# Altium PCB new.PcbDoc (part 2 of 2)
Units mil, origin at the board's own origin, x right, y up, seen from the top; angles counter-clockwise.
Board outline 2755.91 x 2755.91 mil, 4 copper layers (Top Layer, Power Plane, Ground Plane, Bottom Layer), stack 61.12 mil thick; 162 components, 148 nets, 888 pads, 434 vias.
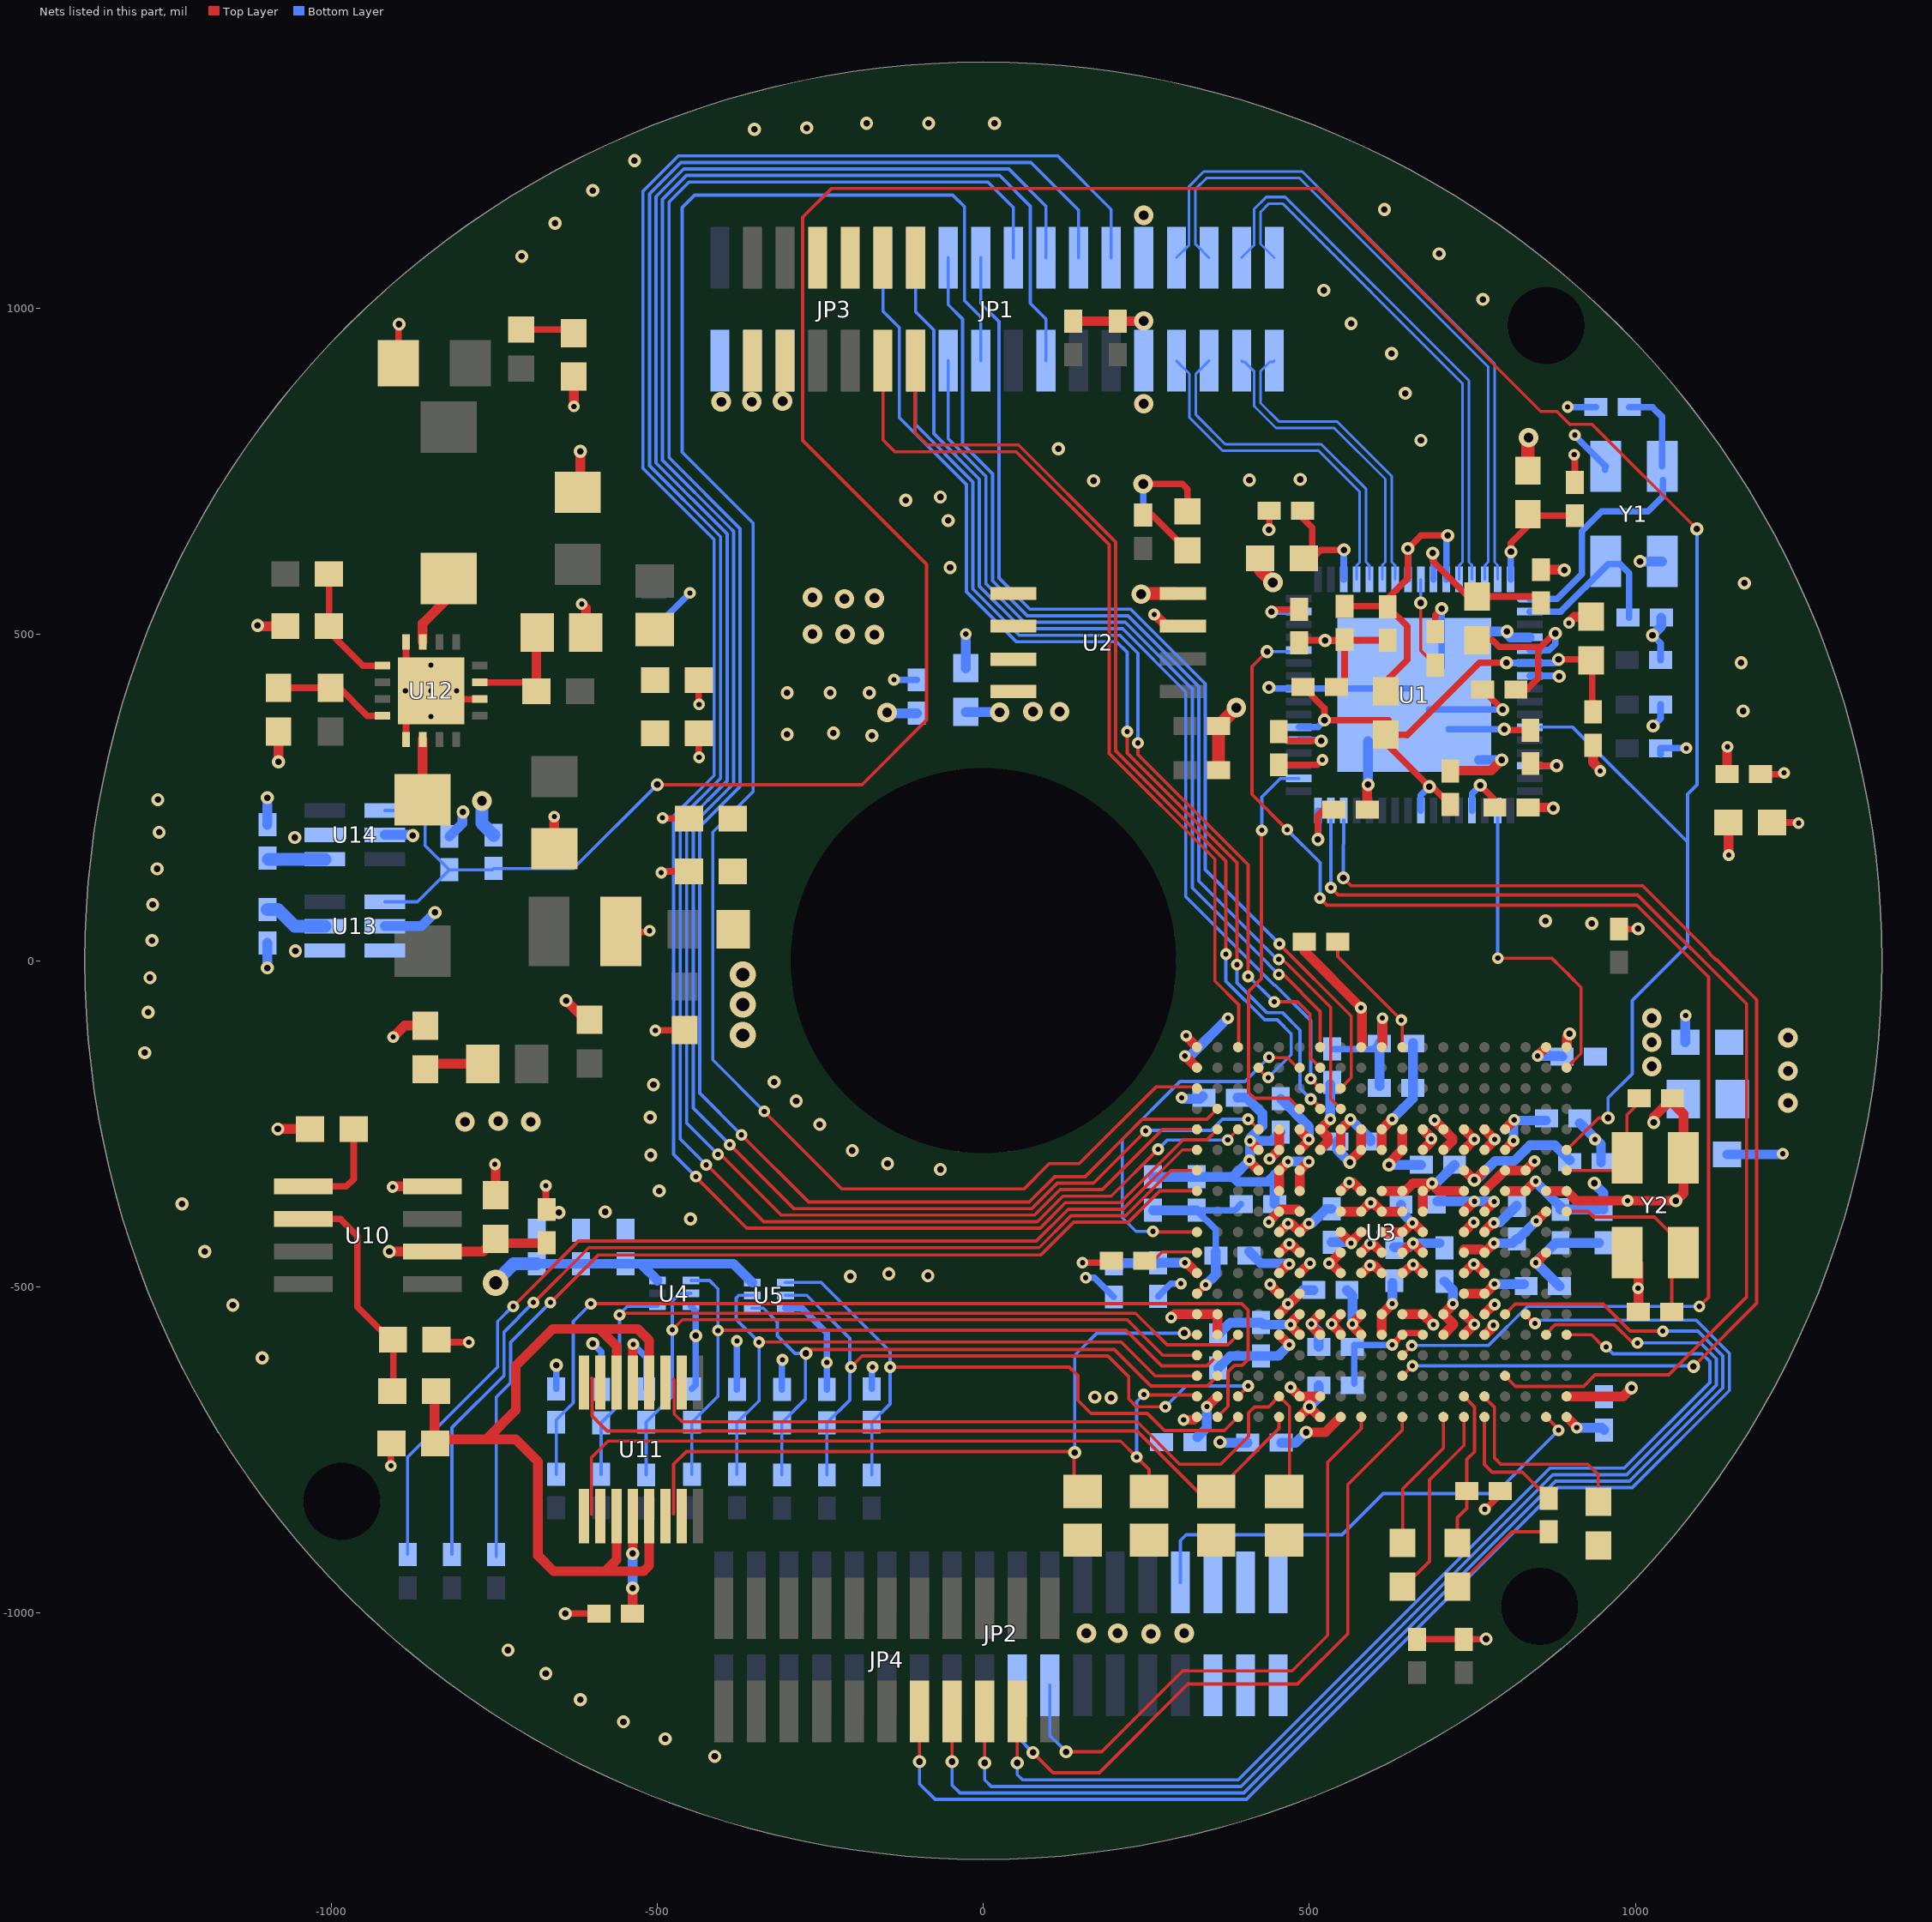
[diagram p4: the nets of this part, all layers, seen from the top]

## Via types
v1: diameter 18, hole 8, Top Layer to Bottom Layer, 208 vias
v2: diameter 20, hole 10, Top Layer to Bottom Layer, 181 vias
v3: diameter 30, hole 15, Top Layer to Bottom Layer, 41 vias
v4: diameter 40, hole 20, Top Layer to Bottom Layer, 4 vias

## Nets (pads, with @x,y where several pads share a name; then routed paths per layer and width w, separated by ;. In a path a pad name is that pad's centre, name@x,y a point inside that pad or via, vN(x,y) a via of type N, cw(c..) or ccw(c..) an arc to the next point about the centre after c; other vN are vias at no path point) (continued)
GND: C1.2 C2.2 C3.1 C4.1 C5.1 C6.1 C7.1 C8.1 C9.1 C10.1 C11.1 C12.1 C13.1 C14.1 C15.1 C16.1 C17.1 C19.1 C20.1 C21.1 C22.1 C23.1 C24.1 C25.1 C26.1 C27.1 C28.1 C29.1 C30.1 C31.1 C32.1 C33.1 C34.1 C35.1 C36.1 C37.2 C38.2 C39.2 C40.2 C41.2 C42.2 C43.2 C44.1 C45.1 C46.1 C47.1 C48.1 C49.1 C50.2 C51.2 C53.2 C54.2 C55.2 C56.2 C57.2 C58.2 C61.1 C62.1 C63.1 C64.1 C65.1 C66.1 C67.1 C85.1 C86.1 C87.1 C88.1 C89.1 C90.1 C91.1 C92.1 C93.1 C94.1 C95.1 C96.1 C97.1 C98.2 C99.1 C100.2 C101.2 C102.2 C104.2 C105.2 C106.2 C107.2 C108.2 C109.1 C110.1 C111.1 C112.1 C113.1 C114.1 JP1.9 JP1.10 JP2.31 JP2.32 JP2.33 JP2.34 JP2.35 JP2.36 JP3.1 JP3.3 JP3.5 JP3.7 R1.1 R2.2 R3.2 R6.2 R7.2 R8.2 R12.1 R49.2 R51.2 R53.1 R62.1 U1.4 U1.41 U1.65 U2.1 U2.2 U2.3 U2.4 U2.7 U3.A1 U3.A10 U3.A19 U3.E5 U3.E6 U3.E8 U3.E12 U3.E14 U3.E15 U3.F5 U3.F6 U3.F8 U3.F12 U3.F14 U3.F15 U3.G16 U3.G17 U3.H8 U3.H9 U3.H10 U3.H11 U3.H12 U3.H14 U3.H15 U3.J5 U3.J6 U3.J8 U3.J9 U3.J10 U3.J11 U3.J12 U3.K8 U3.K9 U3.K10 U3.K11 U3.K12 U3.K14 U3.K15 U3.L5 U3.L6 U3.L8 U3.L9 U3.L10 U3.L11 U3.L12 U3.L18 U3.M8 U3.M9 U3.M10 U3.M11 U3.M12 U3.M14 U3.M15 U3.N1 U3.N5 U3.N6 U3.P1 U3.P2 U3.P5 U3.P7 U3.P8 U3.P11 U3.P12 U3.P14 U3.P15 U3.R2 U3.R5 U3.R7 U3.R8 U3.R14 U3.R15 U3.V6 U3.V7 U3.W1 U3.W6 U3.W7 U3.W19 U4.3 U5.3 U10.4 U11.13 U12.4 U12.9 U12.14 U12.17 U13.2 U14.2 Y1.2 Y1.4 | length 8069.4
  Top Layer w10: v1(-908.54,-774.54) v1(-908.54,-774.54) C95.1@-908.46,-734 ; C101.2@-897.12,916 -897.12,974.88 v2(-896,976) ; U12.9@-885.39,339.2 U12.17@-885.39,375.61 ; U12.17@-885.39,452.39 U12.4@-885.39,488.8 ; C94.1@-838.54,-585 v1(-789,-585) ; U12.17@-834.2,401.2 U12.14@-772.2,401.2 ; C96.1@-671,-380.41 v1(-671,-345) ; v2(-641,-1001) C89.1@-589.59,-1001 ; C102.2@-562.88,44 -514,44 v1(-512,46) ; v1(-503,-107) -502.46,-106.46 C57.2@-458,-106.46 ; v1(-494,135) -492.01,136.99 C58.2@-451.46,136.99 ; v1(-492,219) -491,218 C108.2@-451.46,218 ; C51.2@-436.54,349 -436.54,312.54 v1(-436,312) ; C107.2@-436.54,430 -436.54,393.54 v1(-436,393) ; v1(152,-463) 198.41,-463 199.41,-462 203.41,-466 R62.1@210.41,-459 ; U3.N1@327.54,-510.48 v1(341,-497) ; v2(437.82,661) 438.41,661.59 C3.1@438.41,690 ; C12.1@450.58,300.42 C12.1@453.01,300.42 512.42,300.42 v1(520,308) ; C13.1@488.01,491.42 C7.1@554.01,491.42 ; C14.1@541.6,420.01 554.01,432.42 C7.1@554.01,491.42 ; C7.1@554.01,492.42 C7.1@554.01,491.42 ; C6.1@620.01,491.42 C7.1@554.01,491.42 ; R1.1@693,504.59 693,530 v2(703,540) ; C8.1@765.42,416.01 v2(796.43,385) ; v1(769,-841) 770,-841 792.59,-818.41 R12.1@792.59,-813 ; v2(799,355) 800.4,353.6 C9.1@839.01,353.6 ; v1(906,776) 907.01,774.99 C4.1@907.01,733.6 ; C112.1@1191.59,286 1226,286 v1(1228,288) ; C111.1@1209.46,212 1249,212 v1(1250,211)
  Top Layer w15: v2(-1113,514) -1112,513 R49.2@-1070.46,513 ; v2(-1082,-258) C88.1@-1032.46,-258 ; v2(-1081,305) R51.2@-1081,351.54 ; v1(-906,-347) -905,-346 U10.4@-842,-346 ; v1(-905,-117) -887.54,-99.54 C54.2@-856,-99.54 ; v1(-749,-312) -748,-313 C97.1@-748,-359.54 C97.1@-743.87,-355.41 ; C100.2@-657.99,171.89 v1(-657.99,220.99) ; v2(-640,-61) -604,-97 C53.2@-604,-97.54 ; v1(-628,850) R53.1@-628,895.54 ; C98.2@-617.99,715.13 v2(-618,781) ; v1(-616,547) -609.59,540.59 C99.1@-609.59,503.01 ; U11.13@-537.5,-646.5 -537.5,-593.5 -538,-593 -537,-592 v1(-537,-588) ; R3.2@138,980.59 R2.2@206,980.59 245.59,980.59 v3(246,981) ; v1(262,531) 263,531 281,513 U2.7@309.6,513 ; v1(288,-547) 293.02,-541.98 U3.P1@327.54,-541.98 U3.P2@359.04,-541.98 U3.R2@359.04,-573.47 ; v1(307,-704) 323,-704 U3.W1@327.54,-699.46 ; v1(311.01,-114.99) 310.01,-114.99 U3.A1@327.54,-132.53 ; v1@437.49,-305.48 438.06,-305.48 U3.F5@453.53,-290.01 U3.E5@453.53,-258.51 ; v1(437.81,-400.78) 437.81,-400.22 U3.J5@453.53,-384.5 456.53,-381.49 482.02,-381.49 U3.J6@485.02,-384.5 ; v1(439.8,-496.2) 439.8,-496.76 U3.N5@453.53,-510.48 U3.N5@453.53,-509.47 ; U3.R5@453.53,-573.47 v1(469.01,-588.99) ; U3.P5@453.53,-541.98 U3.N6@485.02,-510.48 ; U3.L5@453.53,-447.49 454.69,-447.49 468.19,-433.99 v1(469.01,-433.99) 471.53,-433.99 U3.L6@485.02,-447.49 U3.L6@485.02,-445.98 ; v1(471,-654) 471.06,-654 U3.V6@485.02,-667.96 U3.V7@516.52,-667.96 ; U3.W6@485.02,-699.46 500.01,-684.47 514.99,-699.46 U3.W7@516.52,-699.46 ; U3.F6@485.02,-290.01 501.01,-274.02 v1(499.01,-273.99) 485.02,-260.01 U3.E6@485.02,-258.51 ; U3.R7@516.52,-570.02 U3.R7@516.52,-573.47 503,-559.95 v1(503,-557) 502.5,-556.5 502.5,-556 U3.P7@516.52,-541.98 ; v1(530,-464) v1@531.5,-464 ; U3.R8@548.02,-573.47 548.02,-571.02 v1(534,-557) 534,-555.99 U3.P8@548.02,-541.98 ; U3.M8@548.02,-478.98 533.03,-464 v1@531.5,-464 ; U3.L8@548.02,-447.49 v1@531.5,-464 ; U3.K8@548.02,-415.99 548.02,-417 v1(564.01,-432.99) 564.01,-431.5 U3.K9@579.51,-415.99 U3.K9@581.01,-415.99 ; U3.J8@548.02,-384.5 U3.J9@579.51,-384.5 593.01,-371 v1(594.02,-371) 597.51,-371 U3.J10@611.01,-384.5 U3.J11@642.5,-384.5 ; U3.H8@548.02,-353 v1(561.01,-339.99) 566.52,-340.01 U3.H9@579.51,-353 ; U3.F8@548.02,-290.01 U3.E8@548.02,-258.51 563,-243.53 v1(563,-243) ; U3.M9@579.51,-478.98 581.02,-478.98 v1(593.01,-466.99) 599.02,-466.99 U3.M10@611.01,-478.98 ; U3.L9@579.51,-447.49 v1(593.01,-433.99) 597.51,-433.99 U3.L10@611.01,-447.49 ; C11.1@588.6,232.01 588.6,268.6 v2(590,270) ; U3.K10@611.01,-415.99 U3.K11@642.5,-415.99 644.01,-415.99 v1(658.01,-401.99) 660,-401.99 U3.K12@674,-415.99 ; U3.H10@611.01,-353 U3.H11@642.5,-353 647,-353 659.01,-340.99 v1@686.01,-340.99 ; U3.A10@611.01,-132.53 612.01,-131.53 v1(612.01,-87.99) ; U3.P11@642.5,-541.98 U3.P12@674,-541.98 v1(690,-557.98) ; U3.M11@642.5,-478.98 644.02,-478.98 657.01,-465.99 v1(659.01,-465.99) 661.01,-465.99 U3.M12@674,-478.98 ; U3.L11@642.5,-447.49 657,-432.99 v1(659.01,-432.99) 659.5,-432.99 U3.L12@674,-447.49 ; U3.J12@674,-384.5 U3.H12@674,-353 v1@686.01,-340.99 ; U3.F12@674,-290.01 687.01,-277 v1(687,-273) ; U3.E12@674,-258.51 v1@687.01,-271.52 ; C15.1@716.01,290.6 716.01,291.51 778.51,291.51 v2(795,308) ; U3.R14@736.99,-573.47 v1(753.01,-557.46) 737.53,-541.98 U3.P14@736.99,-541.98 ; U3.M14@736.99,-478.98 752.01,-463.97 v1(752.01,-464.99) 754.5,-464.99 U3.M15@768.49,-478.98 U3.M15@768.73,-478.98 ; U3.K14@736.99,-415.99 v1(752.01,-400.99) ; U3.H14@736.99,-353 698.02,-353 v1@686.01,-340.99 ; U3.F14@736.99,-290.01 750.48,-276.52 750.48,-272 U3.E14@736.99,-258.51 ; U3.R15@768.49,-573.47 769.53,-573.47 782.01,-560.99 v1(782.01,-558.99) ; U3.P15@768.49,-541.98 768.49,-541.51 783,-527 v1(784,-527) ; U3.K15@768.49,-415.99 768.49,-414.51 781.01,-401.99 v1(783.01,-401.99) ; U3.H15@768.49,-353 U3.G16@799.98,-321.5 U3.G17@831.48,-321.5 845.22,-307.77 v1(845.22,-307.2) ; U3.F15@768.49,-290.01 768.99,-290.01 784.49,-274.51 U3.E15@768.49,-258.51 ; C10.1@835.6,235.01 869.99,235.01 870.98,234 v2(874,234) ; v1(847.01,-462.99) 847.47,-462.99 U3.L18@862.98,-447.49 ; C5.1@855,599.59 890.41,599.59 v2(891,599) ; U3.W19@894.47,-699.46 910.01,-714.99 v1(910.01,-715.99) ; U3.A19@894.47,-132.53 894.47,-132 895.1,-131.37 895.1,-115.9 v2(899.01,-111.99) ; v1@898,519 906.46,527.46 C1.2@932,527.46 ; C2.2@935,330.41 935,304 v1@944,295
  Bottom Layer w10: C110.1@-655,-656.41 v2(-655,-620) ; v2(-599,-587) -586,-600 C109.1@-586,-657.41 ; v1(-537,-588) -517,-608 C62.1@-517,-656.41 ; C50.2@-505,509.54 -504.46,509.54 v1(-450,564) ; U4.3@-448.41,-529.68 -441,-537.09 -441,-650.41 C61.1@-447,-656.41 ; C63.1@-378,-657.41 v1(-378,-583) ; C64.1@-309,-657.41 -309,-611 v1(-308,-612) ; U5.3@-303.41,-532.68 -278.32,-532.68 -240,-571 v1(-240,-616) C66.1@-240,-657.41 ; C65.1@-171,-656.41 v1@-171,-623 ; v1(-137,431) -136.59,430.59 C114.1@-102,430.59 ; v1(157,-486) 170.41,-486 C34.1@200,-515.59 ; C28.1@268,-514.59 287.59,-495 v1(303,-495) ; C23.1@356.41,-452 356.41,-412 C26.1@327,-382.59 385.82,-382.59 C24.1@395.41,-373 ; v2(438,419) 439.79,417.21 U1.41@483.68,417.21 U1.65@651,417.21 ; v2(524,491) U1.65@577.21,491 ; C33.1@535,-135.41 598,-135.41 C32.1@607.42,-125.99 ; U1.65@683.21,385 v2(796.43,385) ; U1.65@703,449.53 v2(703,540) ; U1.65@713.21,355 v2(799,355) ; v1(896,849) C16.1@939.41,849 ; v1(907,806) 907,805.39 Y1.4@953.39,758.99 ; Y1.4@953.39,753.01 Y1.4@953.39,758.99 ; Y1.4@954.39,758 Y1.4@953.39,758.99 ; v2(1026,499) 1038.6,486.4 R6.2@1038.6,461.01 ; v2(1027,360) 1038.59,371.59 R7.2@1038.59,393 ; R8.2@1038.59,316.59 R8.2@1038.59,326 v1(1078,326)
  Bottom Layer w15: v2(-1098,-11) C106.2@-1098,27.41 ; C105.2@-1098,208.59 v2(-1098,250) ; U13.2@-918,53 -862,53 v2(-841,74) ; U14.2@-918,193 -876,193 v2(-875,192) ; C104.2@-819,190.59 -799,210.59 -799,229 v2(-798,228) ; C113.1@-27,448.46 v1(-27,501) ; C36.1@260,-382.59 C26.1@327,-382.59 ; v1(304,-210) 306,-212 332.41,-212 C29.1@336.41,-208 ; v1(341,-497) 356.42,-481.58 C23.1@356.42,-445.99 ; C46.1@360,-624.59 378.6,-605.99 C47.1@426.01,-605.99 452.01,-605.99 v1(469.01,-588.99) ; v2(363,-738) 362,-739 C19.1@405.41,-739 ; C27.1@456.01,-211.4 499.01,-254.4 v1(499.01,-273.99) ; v1(467.01,-525.99) 469.01,-525.99 490.01,-504.99 C21.1@506.42,-504.99 ; v2(500.01,-683.99) 514.42,-669.58 C45.1@514.42,-650.99 ; v1(503,-557) 514.42,-568.42 C44.1@514.42,-591.99 ; C42.2@534.01,-431.58 v1@562.6,-431.58 ; v1(563,-243) 593.59,-273.59 C37.2@593.59,-277 ; v2(590,270) U1.65@590,336.53 ; C32.1@607.42,-125.99 612.01,-121.4 v1(612.01,-87.99) ; C31.1@607.47,-191.99 C32.1@607.47,-126.05 ; C43.2@630.01,-439.4 652.6,-439.4 v1(659.01,-432.99) C41.2@699.6,-432.99 ; C39.2@640.42,-373.99 640.42,-384.4 v1(658.01,-401.99) ; v1(688.01,-340.99) 694.6,-340.99 C38.2@722.59,-313 ; U1.65@758.47,505 v2(803,505) 803,501 808.05,495.95 U1.4@838.01,495.95 ; U1.65@760.21,308 v2(795,308) ; v1(783.01,-401.99) 782.01,-400.99 792.42,-400.99 C25.1@818.01,-375.4 ; C22.1@883.59,-499 847.58,-462.99 v1(847.01,-462.99) 877.42,-432.58 C48.1@885.01,-432.58 C49.1@944.01,-432.58 ; v1(910.01,-715.99) 948.42,-715.99 C20.1@952.01,-719.58 ; C30.1@914.6,-248.99 947.18,-281.57 C40.2@947.18,-308.99 ; v2(1007,612.33) Y1.2@1041,612.33 ; v2(1026,499) 1039.59,512.59 C17.1@1039.59,526 ; C55.2@1076.54,-125 1076.54,-84.54 1076,-84 v1(1077,-84) ; C56.2@1140.46,-297 1225,-297 v1(1226,-296)
  other v1: -170,-623 439,-304 753,-274 784,-274 938,-274 946,291 898,518
  other v2: -412,-1220 -488,-1193 -552,-1167 -618,-1133 -671,-1093 -729,-1057 -1106,-609 -441,-575 -1151,-528 -204,-484 -85,-483 -145,-480 -1194,-446 -449,-396 -651,-386 -580,-385 -1229,-373 -497,-353 -66,-320 -147,-311 -510,-298 -201,-291 -251,-251 -511,-240 -287,-215 -506,-190 -321,-186 -1286,-141 -1281,-79 -1278,-26 -1275,31 933,57 862,61 -1274,86 -1267,141 -1264,197 -1266,247 -171,345 -301,347 -230,349 1165,383 -301,411 -235,411 -175,411 1162,457 1167,579 -51,603 -54,675 -119,706 -66,711 169,736 408,737 486,738 115,785 671,798 647,870 626,931 564,977 766,1014 522,1028 -708,1080 699,1084 -657,1131 615,1152 -599,1181 -535,1227 -351,1275 -271,1277 -179,1284 -84,1284 17,1284
  other v3: 257,-1032 158,-1031 206,-1031 308,-1031 76,382 117,382 246,854 246,1143
GPIO1: R63.2 U3.F1 | length 1597.1
  Top Layer w5: v1(-721,-530) -620.86,-429.86 81.24,-429.86 130.1,-381 214.1,-381 305.09,-290.01 U3.F1@327.54,-290.01
  Bottom Layer w5: R63.2@-883,-910 -883,-761 -745,-623 -745,-553 -721,-529 v1(-721,-530)
GPIO2: R64.2 U3.G1 | length 1540.6
  Top Layer w5: v1(-690,-524) -690,-525 -604.86,-439.86 85.38,-439.86 134.24,-391 218.24,-391 287.74,-321.5 U3.G1@327.54,-321.5
  Bottom Layer w5: R64.2@-815,-910 -815,-716 -735,-636 -735,-569 v1(-690,-524)
GPIO3: R65.2 U3.H1 | length 1485.8
  Top Layer w5: v1(-664,-524) -663,-524 -590,-451 88.38,-451 138.38,-401 222.38,-401 270.38,-353 U3.H1@327.54,-353
  Bottom Layer w5: R65.2@-747,-913 -747,-669 -725,-647 -725,-585 v1(-664,-524)
GPIO84: R15.2 U3.A11 | length 208.7
  Top Layer w5: R15.2@543.59,29 543.59,6.43 v1(641.01,-90.99) 642,-90.99 642.5,-91.5 U3.A11@642.5,-132.53
  Bottom Layer w5: v1@637.01,-86.99 v1(641.01,-90.99)
INH_A: JP1.20 U3.C8 | length 1606
  Top Layer w5: v1(454,26) 454,25.31 564.14,-84.83 564.14,-179.4 U3.C8@548.02,-195.52
  Bottom Layer w5: JP1.20@-4,1078 -4,1008 23.93,980.07 23.93,586.57 71.5,539 226,539 340.4,424.6 340.4,139.6 v1(454,26)
INH_B: JP1.21 U3.A7 | length 1389.2
  Top Layer w5: v1(453,-21) 459.72,-21 516.52,-77.8 U3.A7@516.52,-132.53 U3.A7@518.01,-131.04
  Bottom Layer w5: JP1.21@-54,920 -54,800.43 3.93,742.49 3.93,578.28 63.22,519 217.72,519 320.4,416.32 320.4,111.6 436.5,-4.5 436.5,-4.83 446.17,-14.5 446.5,-14.5 v1(453,-21) v1@453,-24.67
INH_C: JP1.24 U3.C7 | length 1621.8
  Top Layer w5: v1(502,-181) U3.C7@516.52,-195.52
  Bottom Layer w5: JP1.24@-104,1078 -104,995 -76.07,967.07 -76.07,808.35 -6.07,738.35 -6.07,574.14 59.07,509 213.57,509 310.4,412.18 310.4,98.27 446.17,-37.5 447.5,-37.5 502,-92 v1(502,-181)
INL_A: JP1.22 U3.D8 | length 1655.6
  Top Layer w5: v1(453,2) 459,2 472,-11 472.14,-11 532.64,-71.5 532.64,-84.02 532.5,-84.17 532.5,-211.5 U3.D8@548.02,-227.02
  Bottom Layer w5: JP1.22@-54,1078 -54,1006 -31.93,983.93 -31.93,792.5 13.93,746.64 13.93,582.42 67.36,529 221.86,529 330.4,420.46 330.4,122.13 450.53,2 v1(453,2) 453.33,2 v1@457,5.67
INL_B: JP1.23 U3.B7 | length 1453.2
  Top Layer w5: v1(237,334) 237,316.19 406,147.19 v1(406,-24) ; v1(446,-63) 482,-63 501,-82 501,-148.5 U3.B7@516.52,-164.02
  Bottom Layer w5: JP1.23@-104,920 -104,822.14 -16.07,734.21 -16.07,570 54.93,499 209.43,499 237,471.43 v1(237,334) ; v1(406,-24) 407,-24 v1(446,-63)
INL_C: JP1.26 U3.D7 | length 1688
  Top Layer w5: v1(220.5,351.5) 220.5,318.55 389,150.05 v1(389,-6) ; v1(502,-212) 504,-212 516.52,-224.52 U3.D7@516.52,-227.02
  Bottom Layer w5: JP1.26@-154,1078 -154,996 -129,971 -129,833 -26.07,730.07 -26.07,565.86 50.79,489 204.5,489 220.5,473 v1(220.5,351.5) ; v1(389,-6) 389,-34 398.67,-43.67 434.5,-79.5 458.5,-79.5 485.5,-106.5 485.5,-195.5 v1(502,-212)
IRQ: U1.44 U3.T11 | length 2122.9
  Top Layer w5: v2@434.01,474.01 v2(435.01,474.01) 412,451 412,255 v1(466,201) ; v1(516,96) 527,85 1002,85 1112,-25 1112,-516 v1(1098,-530) ; U3.T11@642.5,-604.97 657.01,-590.46 v1(657.01,-589.99)
  Bottom Layer w5: v2(435.01,474.01) U1.44@481.42,474.01 ; v1(466,201) 516.5,150.5 v1@516.5,96.5 ; v1(516,96) v1@517,95 ; v1(657.01,-589.99) 774.34,-589.99 834.33,-530 v1(1098,-530)
LED1: JP2.29 U3.W18 | length 743.8
  Top Layer w5: U3.W18@862.98,-699.46 882,-718.48 v1(882,-720)
  Bottom Layer w5: JP2.29@302,-953 302,-889 311,-880 550,-880 613,-817 785,-817 v1(882,-720) v1@883,-719
LED2: JP2.20 U3.W11 | length 1064
  Top Layer w5: v2(76,-1214) 107,-1245 177.72,-1245 313.72,-1109 481.72,-1109 559,-1031.72 559,-803 642.5,-719.5 U3.W11@642.5,-699.46
  Bottom Layer w5: JP2.20@52,-1111 52,-1190 v2(76,-1214)
LED3: JP2.22 U3.W9 | length 943.6
  Top Layer w5: v2(127,-1213) 181.43,-1213 305.43,-1089 473.43,-1089 528,-1034.43 528,-769 579.51,-717.49 U3.W9@579.51,-699.46
  Bottom Layer w5: JP2.22@102,-1111 102,-1188 v2(127,-1213)
MCU_1V2: C37.1 C38.1 C39.1 C40.1 C41.1 C42.1 C43.1 C58.1 C108.1 C113.2 C114.2 L8.2 U3.E9 U3.E11 U3.F9 U3.F11 U3.G14 U3.G15 U3.J14 U3.J15 U3.K5 U3.K6 U3.P10 U3.P13 U3.R10 U3.R13 | length 966.8
  Top Layer w15: U3.K5@453.53,-415.99 454.01,-415.99 v1(467.01,-402.99) 472.02,-402.99 U3.K6@485.02,-415.99 498.02,-402.99 v1(499.01,-402.99) ; v2(562,-309) 562,-307.52 U3.F9@579.51,-290.01 U3.E9@579.51,-258.51 ; U3.R10@611.01,-573.17 U3.P10@611.01,-541.98 v1(627.01,-525.99) ; v2(622,-313) 621,-312 621,-311.51 U3.F11@642.5,-290.01 U3.E11@642.5,-258.51 ; U3.P13@705.5,-541.98 720.01,-527.46 v1(720.01,-525.99) ; U3.P13@705.66,-541.81 720.97,-557.13 720.97,-558 U3.R13@705.5,-573.47 U3.R13@706.53,-573.47 ; U3.J14@736.99,-384.5 752.5,-368.99 v1(753.01,-368.99) ; U3.G14@736.99,-321.5 738.19,-321.5 v2(752.91,-336.23) 753.76,-336.23 U3.G15@768.49,-321.5 U3.G15@769.5,-321.5 ; U3.J15@768.49,-384.5 783.22,-369.77 v1(783.22,-369.2)
  Bottom Layer w15: v3(-147.59,380.59) -147.59,379.41 C114.2@-102,379.41 ; C113.2@-27,381.54 24.46,381.54 v3(25,381) ; v1(499.01,-402.99) 503.01,-402.99 525.6,-380.4 C42.1@534.01,-380.4 ; C37.1@542.41,-277 542.41,-289.41 v2(562,-309) ; v2(622,-313) C38.1@671.41,-313 ; v1(627.01,-525.99) C43.1@627.01,-493.58 ; C39.1@696.39,-369.2 v1(783.22,-369.2) ; C41.1@707.01,-491.58 720.01,-504.58 v1(720.01,-525.99) ; v2(752.91,-336.23) 752.91,-338.91 785.05,-306.77 814.23,-306.77 838.01,-282.99 876.42,-282.99 C40.1@899.42,-305.99
  other v4: -369,-114 -369,-67 -369,-21
MCU_3V3: C8.2 C9.2 C10.2 C11.2 C12.2 C13.2 C19.2 C20.2 C21.2 C22.2 C23.2 C24.2 C25.2 C26.2 C27.2 C28.2 C29.2 C30.2 C31.2 C32.2 C33.2 C34.2 C35.2 C36.2 C44.2 C45.2 C51.1 C55.1 C105.1 C106.1 C107.1 C111.2 C112.2 JP1.31 JP1.33 JP1.35 JP3.10 JP3.12 L1.1 L2.1 L3.1 L5.2 L7.1 LED5.1 R4.2 R9.2 R10.2 R14.1 R15.1 R52.2 R54.2 R55.1 U1.5 U1.7 U1.14 U1.20 U1.32 U1.37 U1.47 U2.8 U3.A9 U3.A18 U3.B1 U3.E7 U3.E10 U3.E13 U3.E16 U3.F4 U3.F7 U3.F10 U3.F13 U3.F16 U3.G4 U3.G5 U3.G6 U3.H5 U3.H6 U3.J18 U3.L14 U3.L15 U3.M1 U3.M5 U3.M6 U3.N14 U3.N15 U3.P9 U3.R9 U3.R11 U3.R12 U3.V19 U3.W8 U13.3 U13.4 U13.5 U14.4 U14.5 | length 4192.4
  Top Layer w10: v3(245,731) 305,731 313,723 LED5.1@313,689 ; v2(442.01,535.01) 445.6,538.6 C13.2@484.01,538.6 ; C12.2@453.01,351.6 467.6,337.01 v2(518.01,337.01) ; v2(513,186) 513,223 522.01,232.01 C11.2@537.42,232.01 ; v1(627.01,-588.99) U3.R11@642.5,-573.47 ; U3.R11@644.98,-570.99 674,-570.99 U3.R12@674,-573.47 ; R54.2@665,-1040.41 R55.1@737,-1040.41 770.59,-1040.41 v2(771,-1040) ; v2(762.01,269.01) 784.42,246.6 C10.2@784.42,235.01 ; L3.1@769.01,491.54 780.47,491.54 791.02,481 851.01,481 851.01,433.01 834.01,416.01 C8.2@816.6,416.01 ; C9.2@842.42,299.01 v2(879.01,299.01) ; 851.01,477.01 876.01,502.01 v2(877.01,502.01) ; R14.1@975,48.59 999.59,48.59 1000,49 v2(1004,49)
  Top Layer w15: v1(309.01,-462.99) 309.55,-462.45 311.01,-462.45 U3.M1@327.54,-478.98 ; v1(309,-146) 309.52,-146 U3.B1@327.54,-164.02 U3.B1@327.04,-164.02 ; v1(408.01,-305.99) 408.01,-307.48 U3.G4@422.03,-321.5 ; v1(408.79,-276.21) 408.79,-276.77 U3.F4@422.03,-290.01 ; U3.M5@453.53,-478.98 467.52,-464.99 v1(469.01,-464.99) ; U3.H5@453.53,-353 U3.G5@453.53,-321.5 v1(467,-308) ; U3.M6@485.02,-478.98 500.02,-463.99 v1(501.01,-463.99) ; U3.H6@485.02,-353 U3.G6@485.02,-321.5 498.53,-308 v1(499,-308) ; R15.1@492.41,29 492.41,14.59 v1(579,-72) ; v2(495,-723) 524.47,-723 U3.W8@548.02,-699.46 ; U3.F7@516.52,-290.01 516.52,-289.5 528.02,-278 528.02,-270.01 U3.E7@516.52,-258.51 v1(532,-243) ; U3.R9@579.51,-573.47 564.04,-558 579.51,-542.53 U3.P9@579.51,-541.98 ; U3.A9@579.51,-132.53 580.5,-131.54 v1@580.5,-73.5 ; U3.F10@611.01,-290.01 U3.E10@611.01,-258.51 v1@625.52,-244 ; v1(691.77,-244.23) 691.77,-244.79 U3.E13@705.5,-258.51 719.5,-272.52 719.5,-276 U3.F13@705.5,-290.01 ; U3.N14@736.99,-510.48 U3.N15@768.49,-510.48 769.52,-510.48 783.77,-496.23 v1(783.77,-495.76) ; U3.L14@736.99,-447.49 736.99,-442.49 763.49,-442.49 U3.L15@768.49,-447.49 v1(783.01,-432.99) ; U3.F16@799.98,-290.01 813.01,-276.98 v1(813.01,-275.99) ; U3.E16@799.98,-258.51 814.01,-244.49 v1(814.01,-243.99) ; v1@850,-397.47 U3.J18@862.98,-384.5 ; v1(850.01,-145.99) 850.01,-145.5 U3.A18@862.98,-132.53 ; U3.V19@894.47,-667.96 981.04,-667.96 v2(994,-655) ; C112.2@1140.41,286 1140.41,327.41 v1(1141,328) ; C111.2@1142.54,212 1142.54,162.46 v1(1143,162)
  Top Layer w20: v3@253,563.01 U2.8@293.61,563.01 ; R10.2@360.59,292 R9.2@360.59,360 388,387.41 v3(388,388) ; L1.1@424.54,617 424.54,599.46 v3(444,580) ; L2.1@835,751.46 835,801 v3(836,802)
  Bottom Layer w10: R4.2@245,683.59 v3(245,731) ; v2(442.01,535.01) 442.32,535.32 U1.47@483.68,535.32 ; U1.37@483.68,338.47 516.54,338.47 v2(518.01,337.01) ; v2@513.2,186.2 U1.32@513.2,230.2 ; C45.2@568.6,-647.99 568.6,-588.99 v1(627.01,-588.99) ; U1.20@749.43,230.2 749.43,256.43 v2(762.01,269.01) ; U1.14@838.01,299.1 878.91,299.1 v2(879.01,299.01) ; U1.7@838.01,436.9 v2@882.12,436.9 ; U1.5@838.01,476.27 867.27,476.27 877.01,486.01 v2(877.01,502.01)
  Bottom Layer w15: C34.2@201,-463.41 C28.2@268,-463.41 ; C36.2@260,-331.41 C26.2@327,-331.41 382.59,-331.41 ; C28.2@267.6,-462.99 v1(309.01,-462.99) ; v1(309,-146) 317,-146 v1(375,-88) ; C29.2@389.59,-210 403.61,-210 428.01,-234.4 428.01,-252.99 408.79,-272.21 v1(408.79,-276.21) ; C23.2@407.6,-445.99 425.6,-463.99 468.01,-463.99 v1(469.01,-464.99) ; C24.2@446.59,-373 446.59,-328.41 ; C27.2@456.01,-262.58 442.38,-276.21 v1(408.79,-276.21) ; C19.2@456.59,-739 479,-739 v2(495,-723) ; v1(499,-308) v1(467,-308) 446.59,-328.41 ; C33.2@532,-189.59 v1(532,-243) v1@532.59,-242.41 ; C21.2@557.6,-504.99 566,-513.39 v1(566,-557) ; v1(627,-243) 658.65,-211.35 658.65,-126.05 C32.2@658.6,-125.99 ; v1(691.77,-244.23) 692.23,-244.23 v1@692.76,-244.76 ; v1(783.01,-432.99) 811.6,-432.99 C25.2@818.01,-426.58 ; v1(783.77,-495.76) C22.2@829.17,-495.76 ; v1(813.01,-275.99) 813.01,-244.99 C30.2@862.42,-244.99 ; C25.2@820.42,-426.58 v1(848,-399) ; v1(850.01,-145.99) 886.4,-145.99 C35.2@887.41,-147 ; C20.2@952.01,-668.4 980.6,-668.4 v2(994,-655) ; 382.6,-331.4 v1(408.01,-305.99) 408.79,-305.21 v1(408.79,-276.21) ; 382.6,-331.4 390.19,-338.99 436.01,-338.99 446.59,-328.41
  Bottom Layer w20: C106.1@-1098,78.59 -1081.59,78.59 -1056,53 U13.5@-1010,53 ; C105.1@-1096.19,155.6 U14.4@-1010,155.6 ; v3(-769,245) -769,210.59 R52.2@-751,192.59
  other v2: -1055,15 -1056,189 883.01,436.01
  other v3: 1234,-218 1234,-169 1234,-118 -167,500 -262,501 -212,501 -213,555 -167,556 -262,557 242,562 -402,857 -355,857 -308,858
MCU_TCK: R56.2 U3.V15 | length 312.1
  Top Layer w5: U3.V15@768.49,-667.96 768.49,-669.47 783.86,-684.85 783.86,-762.5 793.35,-771.99 926.99,-771.99 943,-788 R56.2@943,-829.54
MCU_TDI: R59.2 U3.W13 | length 219
  Top Layer w5: R59.2@643,-892.54 643,-810 705.5,-747.5 U3.W13@705.5,-699.46
MCU_TDO: R11.1 R60.2 | length 174.7
  Top Layer w5: R60.2@727,-959.46 810.87,-875.59 R11.1@867,-875.59
MCU_TMS: R59.1 U3.W14 | length 300.4
  Top Layer w5: R59.1@643,-959.46 645.54,-959.46 684,-921 684,-795.98 736.99,-742.99 U3.W14@736.99,-699.46
MCU_TRST: R12.2 R60.1 U3.V14 | length 242.1
  Top Layer w5: R60.1@727,-892.54 727,-854 741.41,-839.59 R12.2@741.41,-813 741.41,-764.59 753.11,-752.89 753.11,-684.08 U3.V14@736.99,-667.96
NetC16_2: C16.2 U1.1 Y1.1 | length 465.3
  Bottom Layer w10: U1.1@838.01,555.01 880.01,555.01 918.01,593.01 918.01,659.01 948.01,689.01 1019.01,689.01 1042.01,712.01 Y1.1@1042.01,737.01 ; C16.2@990.59,849 1026,849 1041,834 Y1.1@1041,758
NetC17_2: C17.2 U1.2 Y1.3 | length 256.8
  Bottom Layer w10: U1.2@838.01,535.32 885.32,535.32 958.34,608.34 976.39,608.34 990.42,594.31 C17.2@990.42,526.01
NetC59_1: C59.1 U3.G19 Y2.1 | length 209.9
  Top Layer w5: U3.G19@894.47,-321.5 967.5,-321.5 Y2.1@987.01,-301.99 987.01,-236.4 C59.1@1005.42,-217.99 ; Y2.1@976.52,-321.5 Y2.1@989.01,-333.99
NetC60_1: C60.1 U3.J19 Y2.3 | length 292.9
  Top Layer w5: U3.J19@894.47,-384.5 927.5,-384.5 936,-393 1029.02,-393 Y2.3@1073.62,-437.61 ; C60.1@1055.6,-531.99 1055.6,-465.69 Y2.3@1073.62,-447.66
NetC61_2: C61.2 R16.2 U3.T2 U4.1 | length 1143.2
  Top Layer w5: v1(-407,-567) -406.5,-566.5 218.5,-566.5 273.09,-621.09 342.92,-621.09 U3.T2@359.04,-604.97
  Bottom Layer w5: U4.1@-448.41,-490.32 -419.68,-490.32 -407,-503 v1(-407,-567) -407,-667.59 C61.2@-447,-707.59 R16.2@-447,-787.41
NetC62_2: C62.2 R21.2 U3.T1 U4.2 | length 1150.1
  Top Layer w5: v1(-477,-566) -461.5,-550.5 220.5,-550.5 274.97,-604.97 U3.T1@327.54,-604.97
  Bottom Layer w5: R21.2@-517,-788.41 C62.2@-517,-707.59 -477,-667.59 v1(-477,-566) -477,-522 -465,-510 U4.2@-448.41,-510
NetC63_2: C63.2 R18.2 U3.U1 U5.5 | length 1016.3
  Top Layer w5: v1@-342,-585 -341.5,-584.5 211.5,-584.5 263.46,-636.46 U3.U1@327.54,-636.46
  Bottom Layer w5: R18.2@-378,-787.41 C63.2@-378,-708.59 -344,-674.59 v1(-344,-585) -379,-550 -379,-517 -375,-513 U5.5@-354.59,-513
NetC64_2: C64.2 R57.2 U3.U2 U5.4 | length 986.9
  Top Layer w5: v2(-272,-602) -266,-596 201,-596 256.84,-651.84 343.67,-651.84 U3.U2@359.04,-636.46
  Bottom Layer w5: U5.4@-354.59,-532.68 -337.32,-532.68 -316,-554 -316,-575 -289,-602 -273,-602 -273,-672.59 C64.2@-309,-708.59 R57.2@-309,-788.41
NetC65_2: C65.2 R20.2 U3.W3 U5.1 | length 1010.1
  Top Layer w5: v1(-143,-623) 132,-623 145,-636 145,-674 165.08,-694.08 251.58,-694.08 278,-720.5 369.49,-720.5 U3.W3@390.54,-699.46
  Bottom Layer w5: U5.1@-303.41,-493.32 -248.68,-493.32 -143,-599 -143,-679.59 C65.2@-171,-707.59 R20.2@-171,-788.41
NetC66_2: C66.2 R17.2 U3.V3 U5.2 | length 1053.5
  Top Layer w5: v1(-203,-623) -186,-606 191,-606 223,-638 223,-672 235.08,-684.08 ; 235.17,-684 v1(279,-684) ; U3.V3@390.54,-667.96 406,-652.5 v1(406,-652)
  Bottom Layer w5: U5.2@-303.41,-513 -271,-513 -205,-579 -205,-673.59 C66.2@-240,-708.59 R17.2@-240,-788.41 ; v1(279,-684) 311,-652 v1(406,-652)
NetC88_2: C88.2 U10.5 | length 155.7
  Top Layer w10: U10.5@-1040,-346 -977,-346 -965.54,-334.54 C88.2@-965.54,-258
NetC94_2: C94.2 R44.1 U10.6 | length 355
  Top Layer w10: U10.6@-1043,-396 -986,-396 -960,-422 -960,-530.46 -905.46,-585 -905,-585.46 -905,-655.59 R44.1@-901.59,-659
NetC99_2: C99.2 R46.2 U12.15 | length 163.4
  Top Layer w10: U12.15@-772.2,426.8 R46.2@-690.25,426.8
  Top Layer w15: R46.2@-685.46,422.01 -685.46,501.94 C99.2@-684.39,503.01
NetC109_2: C109.2 R19.2 U3.R3 U4.4 | length 1297.2
  Top Layer w5: v1(-558,-543) -558,-542 -556.5,-540.5 233.36,-540.5 281.86,-589 375.01,-589 U3.R3@390.54,-573.47
  Bottom Layer w5: R19.2@-586,-787.41 C109.2@-586,-708.59 -558,-680.59 -558,-542 -545.68,-529.68 U4.4@-499.59,-529.68
NetC110_2: C110.2 R58.2 U3.W2 | length 1485.7
  Top Layer w5: v1(-602,-526) -601.85,-525.85 396.16,-525.85 405.91,-535.61 405.91,-611.34 396.9,-620.34 384.92,-620.34 375.16,-630.1 375.16,-683.33 U3.W2@359.04,-699.46
  Bottom Layer w5: R58.2@-655,-787.41 C110.2@-655,-707.59 -655,-704 -629,-678 -629,-553 v1(-602,-526)
NetL9_1: L9.1 U12.3 | length 113.7
  Top Layer w15: U12.3@-859.8,488.8 -859.79,517.21 -819.99,557.01 L9.1@-819.99,586.01
NetL10_1: L10.1 U12.10 | length 92.3
  Top Layer w10: U12.10@-859.99,339 U12.10@-859.8,339.2
  Top Layer w15: L10.1@-859.99,247.01 U12.10@-859.99,339
NetLED4_2: LED4.2 R53.2 | length 75.5
  Top Layer w10: LED4.2@-709,968 R53.2@-633.54,968
NetLED5_2: LED5.2 R5.2 | length 90.6
  Top Layer w10: R5.2@245,683.59 258.41,683.59 LED5.2@313,629
NetR1_2: R1.2 U1.57 | length 140.4
  Top Layer w5: v2(670.69,548.69) 670.69,475.72 R1.2@693,453.41
  Bottom Layer w5: v2(670.69,548.69) U1.57@670.69,584.54
NetR11_2: R11.2 U3.W15 | length 193
  Top Layer w5: U3.W15@768.49,-699.46 768.49,-772.49 780,-784 826.59,-784 R11.2@867,-824.41
NetR48_1: R48.1 R49.1 U12.5 | length 172.9
  Top Layer w10: -1003.53,572.01 -1003.53,501.01 -999.99,501.01 -951.38,452.39 U12.5@-921.8,452.39
NetR50_1: R50.1 R51.1 U12.8 | length 168.9
  Top Layer w10: R51.1@-1072.99,418.47 R50.1@-1000.99,418.47 -987.46,418.47 -944.61,375.62 U12.8@-921.8,375.61
NetR62_2: R62.2 U3.L1 | length 72.1
  Top Layer w5: R62.2@261.59,-459 274.1,-446.49 327.54,-446.49 U3.L1@327.54,-447.49
NFAULT: JP1.18 U3.D2 | length 2996.6
  Top Layer w5: v1(-371,-267) -268,-370 70.39,-370 109.39,-331 156,-331 232.5,-254.5 232.5,-254.17 243.67,-243 343.06,-243 U3.D2@359.04,-227.02 U3.D2@359.04,-224.02
  Bottom Layer w5: v1(-371,-267) -435,-203 -435,205.43 -373,267.43 -373,662.57 -482,771.57 -482,1163.28 -451.28,1194 7,1194 46,1155 JP1.18@46,1078
NOCTW: JP1.19 U3.C1 | length 2962.7
  Top Layer w5: v1(-336,-231) -217,-350 62.1,-350 101.1,-311 147,-311 264.5,-193.5 325.52,-193.5 U3.C1@327.54,-195.52
  Bottom Layer w5: v1(-336,-231) -415,-152 -415,197.15 -353,259.15 -353,670.85 -462,779.85 -462,1155 -443,1174 -47,1174 -29,1156 -29,1012 -4,987 JP1.19@-4,920
OSC_GND: C59.2 C60.2 U3.H18 U3.H19 Y2.2 Y2.4 | length 507.5
  Top Layer w5: Y2.2@987.01,-447.66 Y2.2@1004.42,-465.07
  Top Layer w15: U3.H18@862.98,-353 U3.H19@894.47,-353 909.47,-368 v1(988,-368) v2(1062,-368) 1073.62,-356.38 Y2.4@1073.62,-301.99 1073.62,-235.02 C59.2@1056.6,-217.99 ; C60.2@1004.42,-531.99 Y2.2@1004.42,-465.07 ; v2(1028,-248) 1028,-239.59 C59.2@1056.59,-211
  other v1: 1004,-502
OSC_MCU_3V3: C48.2 C49.2 C56.1 L7.2 U3.H16 U3.H17 | length 211.3
  Top Layer w15: U3.H16@799.98,-353 U3.H17@831.48,-353 v1@845.48,-339
  Bottom Layer w15: v1(847,-338) 847,-339 C48.2@885.01,-377.01 ; C48.2@885.01,-381.4 C49.2@944.01,-381.4 ; v2(937,-341) 937,-342 951,-356 C49.2@951,-381.41
  other v3: 1025,-162 1025,-125 1025,-88
QEP1A: JP4.6 U3.R18 | length 1814.9
  Top Layer w5: v2(2,-1230) JP4.6@2,-1151 ; U3.R18@863.53,-573.47 U3.R18@862.98,-573.47 862.98,-572.02 877,-558 967.65,-558 995.65,-586 v1@1001,-586
  Bottom Layer w5: v2(2,-1230) 2,-1256 12,-1266 395.14,-1266 873.14,-788 986.72,-788 1124,-650.72 1124,-610.28 1099.72,-586 v1(1003,-586)
QEP1B: JP4.4 U3.R19 | length 1683.4
  Top Layer w5: v2(52,-1230) JP4.4@52,-1151 ; U3.R19@894.47,-573.47 932.47,-573.47 951,-592 v1(955,-592)
  Bottom Layer w5: v2(52,-1230) 52,-1248 60,-1256 391,-1256 869,-778 982.57,-778 1114,-646.57 1114,-614.43 1102.07,-602.5 965.5,-602.5 v1(955,-592)
QEP1I: JP4.10 U3.P17 | length 2022.1
  Top Layer w5: v2(-98,-1228) JP4.10@-98,-1151 ; U3.P17@831.48,-541.98 831.48,-543.48 844,-556 v1(846,-556)
  Bottom Layer w5: v2(-98,-1228) -98,-1262 -74,-1286 403.43,-1286 881.43,-808 995,-808 1144,-659 1144,-602 1093,-551 851,-551 v1(846,-556)
QEP1S: JP4.8 U3.P16 | length 1979.3
  Top Layer w5: v2(-48,-1228) JP4.8@-48,-1151 ; U3.P16@799.98,-541.98 815.36,-526.6 950.4,-526.6 991.8,-568 v1(1042,-568)
  Bottom Layer w5: v2(-48,-1228) -48,-1264 -36,-1276 399.28,-1276 877.28,-798 990.86,-798 1134,-654.86 1134,-606.14 1095.86,-568 v1(1042,-568)
RD: U1.31 U3.U16 | length 1713.3
  Top Layer w5: v1(533,112) 544,101 1003,101 1170.5,-66.5 1170.5,-515.39 1050.89,-635 938,-635 920.51,-652.49 816.01,-652.49 U3.U16@799.98,-636.46
  Bottom Layer w5: U1.31@532.89,230.2 534,229.09 533,228.09 v1(533,112)
REF3V0: C95.2 R44.2 U11.3 U11.5 U11.12 U11.14 | length 1271.2
  Top Layer w15: R44.2@-850.41,-659 -841.54,-667.87 -841.54,-734 -762,-734 ; -589,-564.5 -562.5,-591 U11.14@-562.5,-646.5 ; -580,-936 -562.5,-918.5 U11.3@-562.5,-851.5 ; U11.5@-512.5,-851.5 -512.5,-927.5 -521,-936 -659,-936 -683,-912 -683,-768 -717,-734 -762,-734 ; U11.12@-512.5,-646.5 -512.5,-582.09 -530.09,-564.5 -660.5,-564.5 -717,-621 -717,-689 -762,-734
RST: C104.1 R52.1 U1.11 U3.F19 U13.1 U14.1 | length 4920.8
  Top Layer w5: v2(-500,270) -186,270 -87,369 -87,608 -277,798 -277,1140 -233,1184 513,1184 854.83,842.17 879.5,842.17 899.5,822.17 899.83,822.17 900.17,822.5 933.5,822.5 v2(1094,662) ; U3.F19@894.47,-290.01 943.48,-241 v2(958,-241)
  Bottom Layer w5: U13.1@-918,90.4 -868.01,90.4 C104.1@-819,139.41 ; U14.1@-918,230.4 -869.4,230.4 -856,217 -856,176.41 C104.1@-819,139.41 ; v2(-500,270) -628.59,141.41 R52.1@-751,141.41 -753,139.41 C104.1@-819,139.41 ; U1.11@838.01,358.16 903.84,358.16 1080,182 ; v2(958,-241) 958,-210.28 995,-173.28 995,-61 1080,24 1080,182 ; v2(1094,662) 1094.5,661.5 1094.5,270 1080,255.5 1080,182
RXA_N: JP1.3 U1.54 | length 482.8
  Bottom Layer w4: JP1.3@396,920 398,918 401,918 415,904 415,850.86 417.93,847.93 448.86,817 538,817 616.47,738.53 616.47,611.06 611.63,606.22 U1.54@611.63,584.54
RXA_P: JP1.1 U1.55 | length 484.8
  Bottom Layer w4: JP1.1@446,920 444,918 439,918 425,904 425,855 453,827 542.14,827 626.47,742.67 626.47,611.06 631.31,606.22 U1.55@631.31,584.54
RXB_N: JP1.4 U1.61 | length 842.9
  Bottom Layer w4: JP1.4@396,1078 415,1097 415,1152.14 433.86,1171 463,1171 744.58,889.42 744.58,611.06 749.43,606.22 U1.61@749.43,584.54
RXB_P: JP1.2 U1.60 | length 810.6
  Bottom Layer w4: JP1.2@446,1078 425,1099 425,1148 438,1161 458.86,1161 734.58,885.28 734.58,611.06 729.74,606.22 U1.60@729.74,584.54
SCI_RXD: JP3.4 U3.A3 | length 1387.8
  Top Layer w5: JP3.4@-154,920 -154,798.86 -135.64,780.5 50.36,780.5 193,637.86 193,317.76 355,155.76 355,-31 391.5,-67.5 391.5,-131.56 U3.A3@390.54,-132.53
SCI_TXD: JP3.2 U3.B4 | length 1467.9
  Top Layer w5: JP3.2@-104,920 -105,919 -105,810 -86,791 54,791 203,642 203,321.9 372,152.9 v1(372,10) ; U3.B4@422.03,-164.02 422.03,-166.03 v1@436,-180
  Bottom Layer w5: v1(372,10) 372,-31.14 431.39,-90.54 450.54,-90.54 472,-112 472,-144 v1(437,-179)
SPI_CLK: U3.B6 U3.K1 | length 575.3
  Top Layer w5: v1(260,-415) 260,-415.98 U3.K1@327.54,-415.99 ; v1(438,-148) 438.65,-148.65 466.65,-148.65 482.02,-164.02 U3.B6@485.02,-164.02
  Bottom Layer w5: v1(260,-415) 234,-415 213,-394 213,-273.67 301.67,-185 401,-185 v1(438,-148)
SPIA_CLK: JP1.14 U3.E3 | length 3268.9
  Top Layer w5: v1(-425,-313) -424,-313 -337,-400 82.81,-400 121.81,-361 196,-361 v1(268,-289) ; v1(374.81,-274.8) 374.81,-274.24 U3.E3@390.54,-258.51
  Bottom Layer w5: v1(-425,-313) -465,-273 -465,217.86 -403,279.86 -403,650.14 -512,759.14 -512,1175.71 -463.71,1224 73,1224 146,1151 JP1.14@146,1078 ; v1(268,-289) 282.2,-274.8 v1(374.81,-274.8) v1@374.11,-275.5
SPIA_CS: JP1.15 U3.E4 | length 3304.6
  Top Layer w5: v1(-389,-282) -291,-380 74.53,-380 113.53,-341 169,-341 v1(249,-261) ; v1(406.01,-242.99) 406.51,-242.99 U3.E4@422.03,-258.51
  Bottom Layer w5: v1(-389,-282) -445,-226 -445,209.57 -383,271.57 -383,658.43 -390.57,666 -492,767.43 -492,1167.43 -455.43,1204 25,1204 72,1157 72,1008 96,984 JP1.15@96,920 ; v1(249,-261) 250,-261 252,-259 253,-260 349.33,-260 366.34,-242.99 v1(406.01,-242.99)
SPIA_SIMO: JP1.16 U3.E1 | length 3106.8
  Top Layer w5: v1(-407,-297) -405,-295 -310,-390 78.67,-390 117.67,-351 182.33,-351 266.5,-266.83 266.5,-266.5 274.49,-258.51 U3.E1@327.54,-258.51
  Bottom Layer w5: v1(-407,-297) -455,-249 -455,213.72 -393,275.72 -393,654.28 -502,763.28 -502,1171.57 -459.57,1214 39,1214 96,1157 JP1.16@96,1078
SPIA_SOMI: JP1.12 U3.E2 | length 3340.3
  Top Layer w5: v1(-441,-331) -441,-332 -363,-410 86.95,-410 125.95,-371 209.95,-371 306.32,-274.63 342.92,-274.63 U3.E2@359.04,-258.51
  Bottom Layer w5: v1(-441,-331) -475,-297 -475,222 -413,284 -413,646 -522,755 -522,1179.85 -467.85,1234 114,1234 196,1152 JP1.12@196,1078
SYNC0: U1.34 U3.D6 | length 618.5
  Top Layer w5: v1(427,200) 426.5,199.5 426.5,-27.36 406.66,-47.2 406.66,-201.89 415.66,-210.89 468.9,-210.89 U3.D6@485.02,-227.02
  Bottom Layer w5: v1(427,200) 427,251 455.42,279.42 U1.34@483.68,279.42
SYNC1: U1.18 U3.B19 | length 505.1
  Top Layer w5: v1(789,4) 871.72,4 888.21,-12.49 888.84,-12.49 898.51,-22.16 898.51,-22.79 916.51,-40.79 916.51,-141.99 U3.B19@894.47,-164.02
  Bottom Layer w5: U1.18@788.8,230.2 788.8,4.2 v1(789,4)
TCK_RET: R56.1
TXA_N: JP1.7 U1.52 | length 540.1
  Bottom Layer w4: JP1.7@296,920 316,900 316,832.86 366.86,782 514,782 577.1,718.9 577.1,611.06 572.26,606.22 U1.52@572.26,584.54
TXA_P: JP1.5 U1.53 | length 540.1
  Bottom Layer w4: JP1.5@346,920 326,900 326,837 371,792 518.14,792 587.1,723.04 587.1,611.06 591.94,606.22 U1.53@591.94,584.54
TXB_N: JP1.8 U1.63 | length 1050
  Bottom Layer w4: JP1.8@296,1078 315.43,1097.43 315.43,1187.43 338,1210 489,1210 783.95,915.05 783.95,611.06 788.8,606.22 U1.63@788.8,584.54
TXB_P: JP1.6 U1.62 | length 1017.4
  Bottom Layer w4: JP1.6@346,1078 325.43,1098.57 325.43,1183.29 342.14,1200 484.86,1200 773.95,910.91 773.95,611.06 769.11,606.22 U1.62@769.11,584.54
VDD12TX1: C6.2 C7.2 L4.2 U1.56 U1.59 | length 474.3
  Top Layer w10: C7.2@554.01,543.6 608.13,543.6 651.01,586.47 v2(651.01,632.01) 671.01,652.01 v2(712.01,652.01) ; C6.2@620.01,542.6 650.01,512.6 650.01,461.47 L4.2@623.01,434.47
  Bottom Layer w10: U1.56@651,584.54 v2(651.01,632.01) ; U1.59@710.06,584.54 v2@710.06,650.06
VDD33BIAS: C5.2 L3.2 U1.58 | length 246.8
  Top Layer w10: v2(689.01,625.01) 689.01,613.01 743.54,558.47 844.94,558.47 C5.2@855,548.41
  Bottom Layer w10: v2(689.01,625.01) 689.73,625.01 v2@690.37,625.65 ; U1.58@690.37,584.54 v2@690.37,625.01
VDD33TXRX1: C3.2 L1.2 U1.51 | length 172
  Top Layer w10: C3.2@486.6,682.01 504.47,664.13 504.47,617.01 517.47,630.01 v2(553.01,630.01)
  Bottom Layer w10: U1.51@552.57,584.54 552.57,629.57 v2(553.01,630.01)
VDD33TXRX2: C4.2 L2.2 U1.64 | length 171.6
  Top Layer w10: v2(809.01,627.01) 809.01,640.54 841.01,672.54 850.88,682.42 C4.2@907.01,682.42
  Bottom Layer w10: U1.64@808.48,584.54 808.48,626.48 v2(809.01,627.01)
VDDA_MCU_3V3: C46.2 C47.2 C54.1 C67.2 C85.2 C86.2 C87.2 C89.2 C96.2 C97.2 L6.2 U3.P6 U3.R6 U3.V2 U4.6 U5.6 U10.2 U11.4 | length 1179.2
  Top Layer w6: v1(342.73,-683.71) v1@343.29,-683.71
  Top Layer w15: v2(-911,-446) U10.2@-845,-446 -767.54,-446 C97.2@-748,-426.46 -741.46,-433 C96.2@-669.59,-433 ; C54.1@-847.54,-158 L6.2@-767.4,-158 ; C89.2@-538.41,-1001 -538,-1000.59 v2(-538,-962) ; v2(-538,-909) -537.5,-908.5 U11.4@-537.5,-851.5 ; v1@343.29,-683.71 U3.V2@359.04,-667.96 ; U3.R6@485.02,-572.01 U3.R6@485.02,-573.47 470.01,-558.46 470.01,-556.99 U3.P6@485.02,-541.98
  Bottom Layer w6: C67.2@328,-734.91 C67.2@328,-730.37
  Bottom Layer w15: C87.2@-685,-464.59 C85.2@-617,-464.59 C86.2@-549,-464.59 -525.32,-464.59 ; v2(-538,-962) v2(-538,-909) ; U4.6@-499.59,-490.32 -525.32,-464.59 ; U5.6@-354.59,-493.32 -383.32,-464.59 -525.32,-464.59 ; C67.2@328,-730.37 342.73,-715.64 v1(342.73,-683.71) ; C46.2@360,-573.41 378.6,-554.81 C47.2@426.01,-554.81 ; C47.2@429.19,-557.99 430.19,-556.99 431.19,-557.99 v1(471.01,-557.99)
  Bottom Layer w20: v4(-748,-494) -748,-492 -720.59,-464.59 C87.2@-685,-464.59
  other v2: 196,-670 171,-669
  other v3: -795,-247 -694,-247 -744,-246
VDDCR: C1.1 C2.1 C14.2 C15.2 L4.1 U1.6 U1.24 U1.38 | length 854.5
  Top Layer w10: C14.2@490.42,420.01 523.01,387.42 v2(523.01,369.01) 621.54,369.01 L4.1@621.54,346.54 ; L4.1@617,346.54 L4.1@621.54,346.54 ; C15.2@716.01,239.42 688.42,267.01 v2(684.01,267.01) 621.54,329.47 L4.1@621.54,346.54 ; v2(802.17,457) 760.77,457 649.77,346 649.24,346.54 L4.1@621.54,346.54 ; v2(882.01,462.01) 918.54,462.01 933.54,447.01 933.54,399.13 C2.1@943.54,389.13
  Bottom Layer w10: U1.38@483.68,358.16 513.16,358.16 523.01,368.01 v2(523.01,369.01) ; U1.24@670.69,230.2 670.69,253.69 v2(684.01,267.01) ; v2(802.17,457) 802.58,456.58 U1.6@838.01,456.58 876.58,456.58 v2(882.01,462.01)
VREFHIA: C90.2 U3.V1 U11.1 U11.2 | length 1187.1
  Top Layer w5: -601,-849 -601,-762 -575.5,-736.5 210.5,-736.5 v1(235,-761) 254,-780 C90.2@254,-813.6 ; v1@246,-666 325.58,-666 U3.V1@327.54,-667.96
  Bottom Layer w5: v1(235,-761) 235,-676 v1(246,-665)
VREFHIB: C91.2 U3.W5 U11.15 U11.16 | length 1217.4
  Top Layer w5: -601,-640 -600,-641 -600,-698 -577,-721 235.86,-721 328.46,-813.6 C91.2@357,-813.6 453.53,-717.07 U3.W5@453.53,-699.46
VREFHIC: C92.2 U3.R1 U11.6 U11.7 | length 1112.5
  Top Layer w5: -475,-848 -475,-772 -455.5,-752.5 138.5,-752.5 v2(140,-754) 139,-755 C92.2@139,-813.6 ; v2(308,-571) 308,-573 308.47,-573.47 U3.R1@327.54,-573.47
  Bottom Layer w5: v2(140,-754) 140,-605 174,-571 v2(308,-571)
VREFHID: C93.2 U3.V5 U11.10 U11.11 | length 1233
  Top Layer w5: -475,-642 -474,-643 -474,-695 -462,-707 236,-707 301,-772 364,-772 406.66,-729.34 406.66,-693.09 415.66,-684.08 437.41,-684.08 U3.V5@453.53,-667.96 469.57,-684 469.57,-805.03 C93.2@461,-813.6
WR: U1.30 U3.U11 | length 1872.4
  Top Layer w5: v2(552,127) 564,115 1011,115 1113.5,12.5 1113.5,11.17 1123.17,1.5 1124.5,1.5 1186,-60 1186,-525 v2(1089,-622) ; U3.U11@642.5,-636.46 v1(658,-621) v1@658.98,-620.02
  Bottom Layer w5: v2(552,127) U1.30@552.58,230.2 ; v1(658,-621) 1088,-621 v2(1089,-622)
pads on no net: A.0 JP1.25 JP1.27 JP1.28 JP1.29 JP2.2 JP2.4 JP2.8 JP2.10 JP2.11 JP2.12 JP2.13 JP2.14 JP2.15 JP2.16 JP2.17 JP2.18 JP2.19 JP2.21 JP2.23 JP2.24 JP2.25 JP2.26 JP2.27 JP2.28 JP2.30 JP4.16 R63.1 R64.1 R65.1 U1.3 U3.A5 U3.A8 U3.A12 U3.A13 U3.B3 U3.B5 U3.B8 U3.B9 U3.B10 U3.B12 U3.B13 U3.C3 U3.C4 U3.C5 U3.C6 U3.C9 U3.C10 U3.C11 U3.C12 U3.C13 U3.C18 U3.C19 U3.D3 U3.D4 U3.D5 U3.D9 U3.D10 U3.D11 U3.D12 U3.D13 U3.D14 U3.D17 U3.D18 U3.D19 U3.E17 U3.E18 U3.E19 U3.F2 U3.F3 U3.F17 U3.F18 U3.G2 U3.G3 U3.G18 U3.H2 U3.H3 U3.H4 U3.J3 U3.J4 U3.J16 U3.J17 U3.K2 U3.K4 U3.K16 U3.K17 U3.K18 U3.K19 U3.L2 U3.L3 U3.L4 U3.L16 U3.L17 U3.L19 U3.M2 U3.M3 U3.M4 U3.M16 U3.M17 U3.M18 U3.M19 U3.N2 U3.N3 U3.N4 U3.N16 U3.N17 U3.N18 U3.N19 U3.P3 U3.P4 U3.P18 U3.P19 U3.R4 U3.R16 U3.R17 U3.T3 U3.T4 U3.T5 U3.T6 U3.T7 U3.T8 U3.T9 U3.T10 U3.T12 U3.T13 U3.T14 U3.T15 U3.T17 U3.T18 U3.T19 U3.U3 U3.U4 U3.U5 U3.U6 U3.U7 U3.U8 U3.U10 U3.U17 U3.U18 U3.V4 U3.V9 U3.V13 U3.V18 U3.W4 U3.W12 U4.5 U10.1 U10.3 U10.7 U10.8 U11.8 U11.9 U12.6 U12.7 U13.6 U14.6

## Polygon pours and split planes (outlines as drawn)
GND on Bottom Layer "Mechanical 1-No Net" (hatched 90Degree grid 10 track 8, remove dead copper, pour order 4): -1307.31,422.31 -1085,856 -914,1040 -709.68,1188.94 -407.68,1321.94 -322.36,1346.82 -269.64,1362.19 -136.68,1378.94 157.16,1372.91 191.32,1366.94 306.32,1346.82 459.29,1305.85 584.32,1250.94 765.32,1150.94 893.32,1059.94 982.82,970.44 1090.32,856 1174.9,719.98 1301.32,475.94 1366.32,177.94 1366.32,-79.06 1336.32,-342.06 1237.32,-607.06 1090.32,-840.06 883,-1060 633,-1223 350,-1335 41,-1383 -261,-1361 -550,-1264 -810.22,-1115.17 -1098.09,-847.22 -1257,-569 -1361,-246 -1375,91
GND on Top Layer "Mechanical 1-No Net" (hatched 45Degree grid 10 track 8, remove dead copper, pour order 6): -912,1037 -745,1170 -546,1276 -274,1365 17,1380 274,1363 520,1291 735,1180 928,1037 1122,820 1269.5,567.5 1321,435 1355,297 1380,154 1384,13 1384,9 1382,-26 1359,-284 1276,-551 1122,-821 909,-1051 696,-1198 466,-1307 214,-1374 -41,-1383 -309,-1347 -565,-1267 -808,-1128 -1014,-946 -1165,-745 -1283,-522 -1354.88,-292 -1380,-171 -1386,-56 -1386,-34 -1354.88,251.11 -1270,536 -1118,805 -918,1039
GND on Ground Plane (split plane): 273 vertices, not listed, extent -1357.94,-1357.94 1357.94,1357.94
OSC_MCU_3V3 on Power Plane (split plane): 1111.91,-252.82 994.82,-369.91 825.09,-369.91 825.09,-334 824.74,-331.39 823.73,-328.96 822.13,-326.87 818.35,-323.09 825,-323.09 827.61,-322.74 830.04,-321.74 832.13,-320.13 862.18,-290.09 957,-290.09 959.61,-289.74 962.04,-288.74 964.13,-287.13 965.73,-285.04 966.74,-282.61 967.09,-280 967.09,-96.18 998.18,-65.09 1111.91,-65.09
3V3 on Power Plane (split plane): -551.09,824 -550.74,821.39 -549.74,818.96 -548.13,816.87 -426.09,694.82 -426.09,599.09 -701.82,599.09 -807.91,705.18 -807.91,788 -807.91,964.82 -784.82,987.91 -551.09,987.91
MCU_1V2 on Power Plane (split plane): 350.91,314.82 350.91,-60 350.91,-303 351.26,-305.61 352.27,-308.04 353.87,-310.13 387.87,-344.13 389.96,-345.74 392.39,-346.74 395,-347.09 532,-347.09 534.61,-346.74 537.04,-345.74 539.13,-344.13 540.73,-342.04 541.74,-339.61 542.09,-337 542.09,-290.18 547.18,-285.09 682.82,-285.09 707.87,-310.13 709.96,-311.74 712.39,-312.74 715,-313.09 779.82,-313.09 804.91,-338.18 804.91,-373.82 745.88,-432.86 744.27,-434.95 743.27,-437.38 742.92,-439.99 742.92,-536.81 729.82,-549.91 631.18,-549.91 578.09,-496.82 578.09,-466 577.74,-463.39 576.73,-460.96 575.13,-458.87 543.13,-426.87 541.04,-425.26 538.61,-424.26 536,-423.91 254,-423.91 251.39,-424.26 248.96,-425.26 246.87,-426.87 245.27,-428.96 244.26,-431.39 243.91,-434 243.91,-626.91 -289.82,-626.91 -466.87,-449.87 -548.87,-367.87 -628.91,-287.82 -628.91,-218.18 -577.82,-167.09 -543,-167.09 -540.39,-166.74 -537.96,-165.74 -535.87,-164.13 -418.87,-47.13 -417.26,-45.04 -416.97,-44.33 -416.26,-42.61 -415.91,-40 -415.91,267.91 -322,267.91 -319.39,268.26 -316.96,269.27 -314.87,270.87 -299.87,285.87 -121.82,463.91 201.82,463.91
VDDA_MCU_3V3 on Power Plane (split plane): -649.09,-218.18 -649.09,-292 -648.74,-294.61 -647.74,-297.04 -646.13,-299.13 -563.13,-382.13 -481.13,-464.13 -301.13,-644.13 -299.04,-645.74 -296.61,-646.74 -294,-647.09 343.82,-647.09 377.91,-681.18 377.91,-756.82 322.82,-811.91 -140,-811.91 -142.61,-812.26 -143.83,-812.76 -145.04,-813.26 -147.13,-814.87 -369.98,-1037.72 -505.02,-1037.72 -1100.91,-441.82 -1100.91,-162.09 -705.18,-162.09
MCU_3V3 on Power Plane (split plane): 273 vertices, not listed, extent -1357.94,-1357.94 1357.94,1357.94

## Other copper
Top Layer:
  rectangle net MCU_3V3: -290,538 -287,581
  rectangle net MCU_3V3: -373,540 -288,873
  rectangle net MCU_3V3: -420,839 -288,968
  rectangle net 5V0: -418,1030 -289,1157
  rectangle net GND: 121,-933 136,-861
  rectangle net GND: 468,-925 502,-861
  rectangle net GND: 136,-1055 468,-861
  rectangle net 3V3: -495,594 -433,623
  rectangle net GND: 4,403 53,581
  rectangle net 3V3: -495,623 -434,677
  rectangle net 3V3: -533,563 -475,642
  rectangle net MCU_3V3: -287,540 -136,581
  rectangle net 3V3: -766,-98 -715,-45
  rectangle net 3V3: -717,-188 -667,-46
  rectangle net 5V0: -786,445 -745,500
  rectangle net GND: 53,361 140,581
  rectangle net MCU_3V3: -531,466 -136,540
  rectangle net MCU_3V3: -529,293 -468,540
  rectangle net MCU_1V2: -418,-152 -312,250
  rectangle net VDDA_MCU_3V3: -749,-273 -667,-213
  rectangle net VDDA_MCU_3V3: -819,-273 -739,-122
  rectangle net 5V0: -846.99,473.01 -797.99,508.01
  rectangle net 5V0: -843.99,320.01 -799.99,354.01
  rectangle net 3V3: -850,777 -750,997
  rectangle net 3V3: -750,776 -670,939
  rectangle net VREFHID: -495,-690 -454,-599
  rectangle net VREFHIB: -620,-690 -579,-603
  rectangle net VREFHIC: -496,-896 -455,-805
  rectangle net VREFHIA: -621,-894 -580,-803
Bottom Layer:
  rectangle net GND: 131,-1054 365,-1009
  rectangle net GND: 336,-1167 468,-894
  rectangle net OSC_GND: 1030,-516 1097,-387
  rectangle net OSC_GND: 1005,-331 1039,-237
  rectangle net OSC_MCU_3V3: 1005,-173 1047,-69
  rectangle net OSC_MCU_3V3: 1005,-230 1049,-173
  rectangle net OSC_MCU_3V3: 1049,-325 1100,-173
  rectangle net MCU_3V3: 1118,-248 1258,-94
  rectangle net 3V3: -1194,-97 -666,-44
  rectangle net 3V3: -1194,-58 -1129,623
  rectangle net 3V3: -1176,549 -900,623
  rectangle net 3V3: -992,549 -900,818
  rectangle net 3V3: -993,775 -679,895
  rectangle net GND: -699,-432 -534,-373
  rectangle net VDDA_MCU_3V3: -369,-502 -341,-482
  rectangle net VDDA_MCU_3V3: -518,-498 -487,-478
  rectangle net GND: -461,-544 -435,-524
  rectangle net VDDA_MCU_3V3: 152,-664 203,-607
  rectangle net VDDA_MCU_3V3: 152,-683 227,-664
  rectangle net VDDA_MCU_3V3: 203,-683 227,-608
  rectangle net VDDA_MCU_3V3: 203,-630 274,-588
  rectangle net VDDA_MCU_3V3: 274,-628 339,-588
  rectangle net VDDA_MCU_3V3: 323,-606 329,-573
  rectangle net VDDA_MCU_3V3: 329,-593 377,-573
  rectangle net VDDA_MCU_3V3: 346,-574 375,-546
  rectangle net VDDA_MCU_3V3: 375,-574 456,-538
  rectangle net GND: 230,835 263,1157
  rectangle net OSC_GND: 979,-516 1030,-237
  rectangle net OSC_GND: 979,-387 1097,-331
  rectangle net MCU_3V3: -1070,132 -969,209
  rectangle net MCU_3V3: -1068,-1 -972,71
  rectangle net MCU_3V3: -982,0 -886,34
  rectangle net 5V0: -418,1030 -289,1157
  rectangle net MCU_3V3: -419,839 -289,970
Power Plane (plane layer: these items are gaps in the copper):
  lines w20: -630,-83 -627,-80 ; 254,-636 254,-434 536,-434 568,-466 568,-501 627,-560 734,-560 753.01,-540.99 753.01,-439.99 813,-380 ; 386.5,-763.5 390,-760 389,-760 327,-822 326,-822 -140,-822 -365.8,-1047.8 -438,-1047.8 -509.2,-1047.8 -1111,-446 -1111,-152 -761,-152 -701,-152 -639,-214 ; 388,-760 388,-677 348,-637 -294,-637 -474,-457 -556,-375 -639,-292 -639,-214 ; 685,-275 625,-275 543,-275 532,-286 532,-337 518,-337 395,-337 361,-303 361,-60 361,319 206,474 -126,474 -307,293 -322,278 -425,278 -426,277 -426,-40 -543,-157 -582,-157 -639,-214 ; 686,-274 715,-303 784,-303 815,-334 815,-380 813,-380 ; 796,-313 825,-313 858,-280 957,-280 957,-92 994,-55 1122,-55 1122,-257 999,-380 941,-380 813,-380 ; -818,701 -706,589 -416,589 -416,699 -541,824 -541,998 -789,998 -818,969 -818,788 -818,701

## Silkscreen, mask and mechanical layers (free items; w line width, h text height)
Mechanical 1:
  circle w10: c0,0 r1377.95